# Altium PCB PCB1.PcbDoc
Units mm, origin at the board's own origin, x right, y up, seen from the top; angles counter-clockwise.
Board outline 52.2 x 46.48 mm, 2 copper layers (Top Layer, Bottom Layer); 58 components, 44 nets, 227 pads, 43 vias.
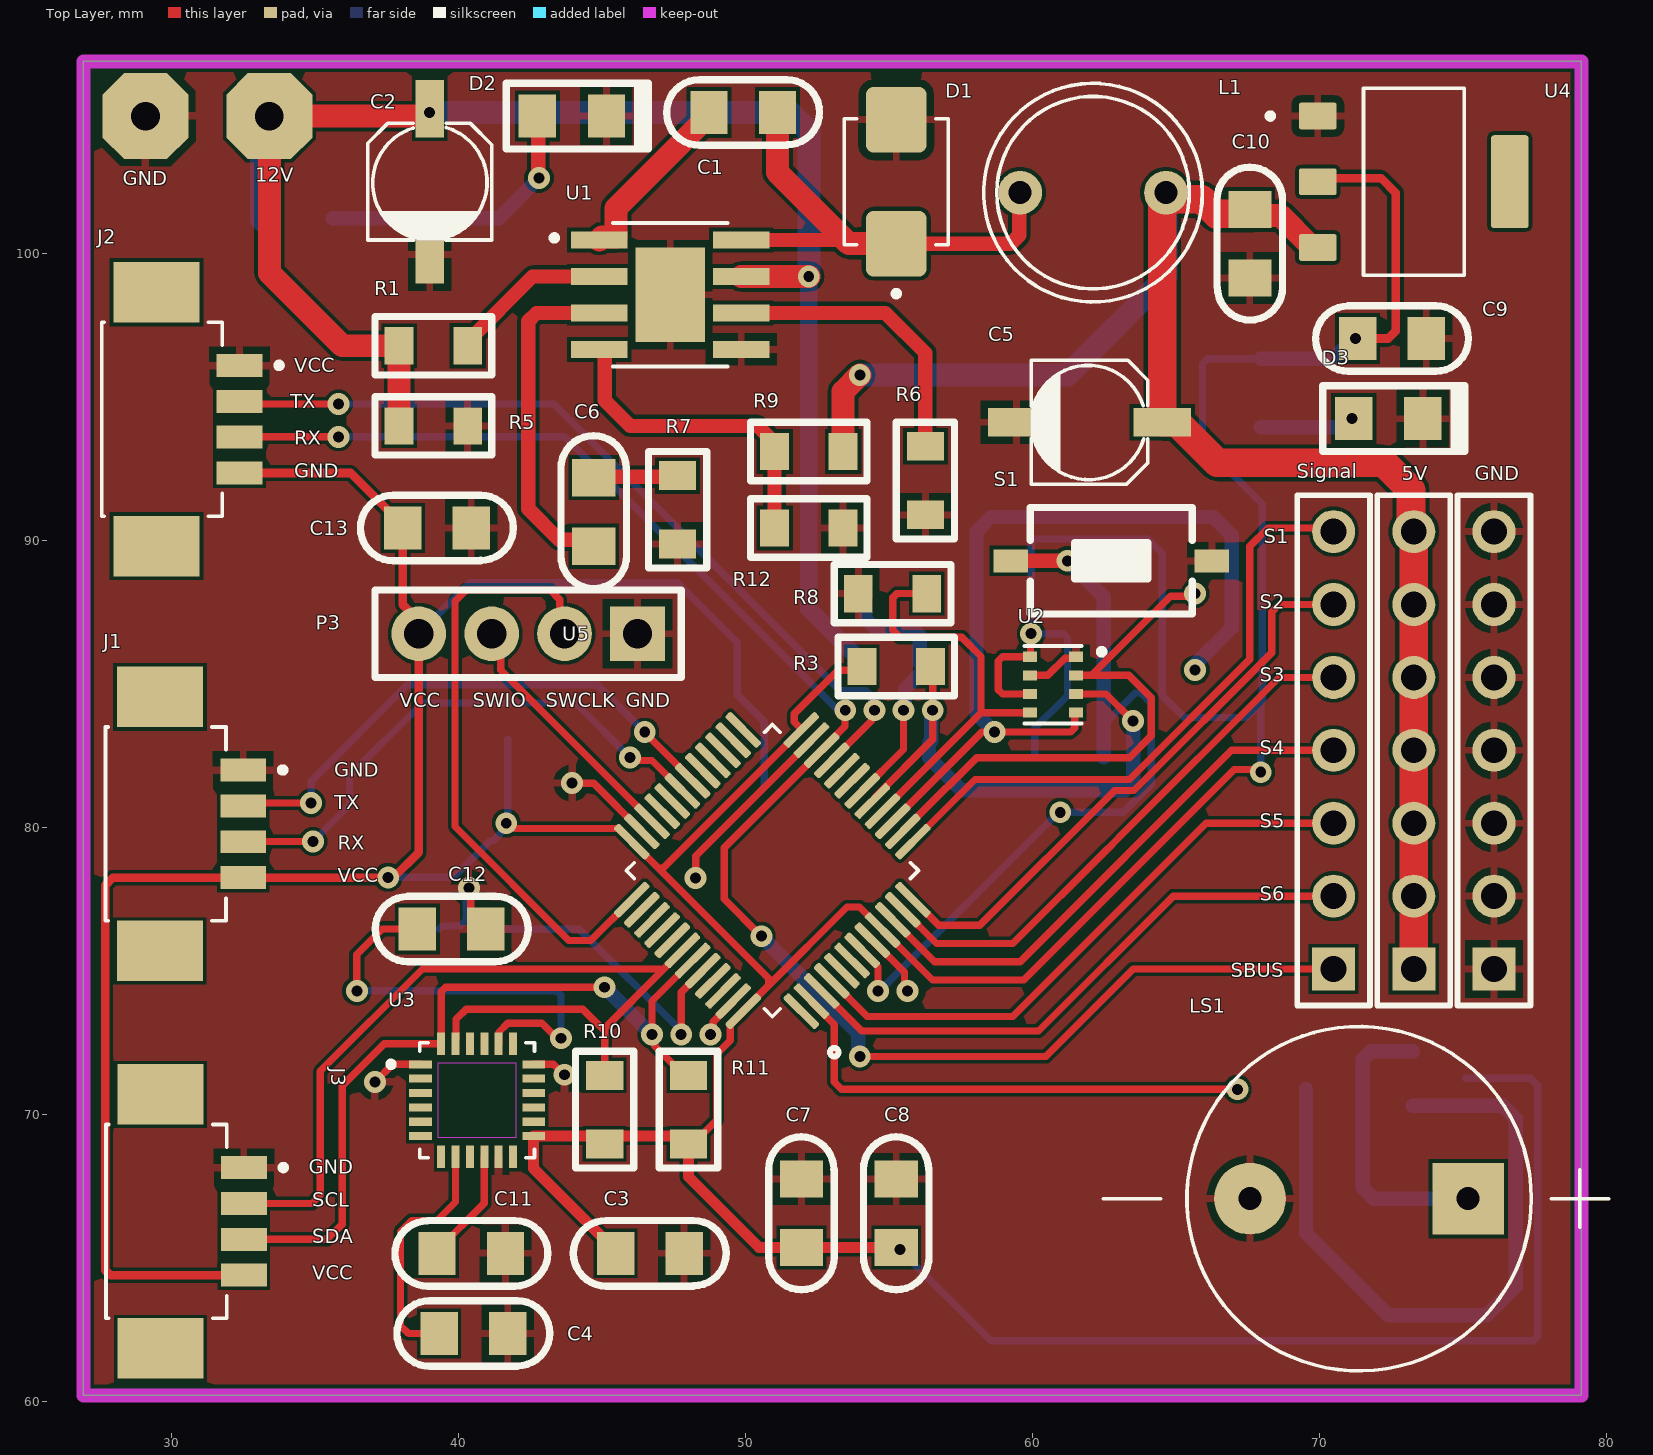
[diagram p0: Top Layer view]
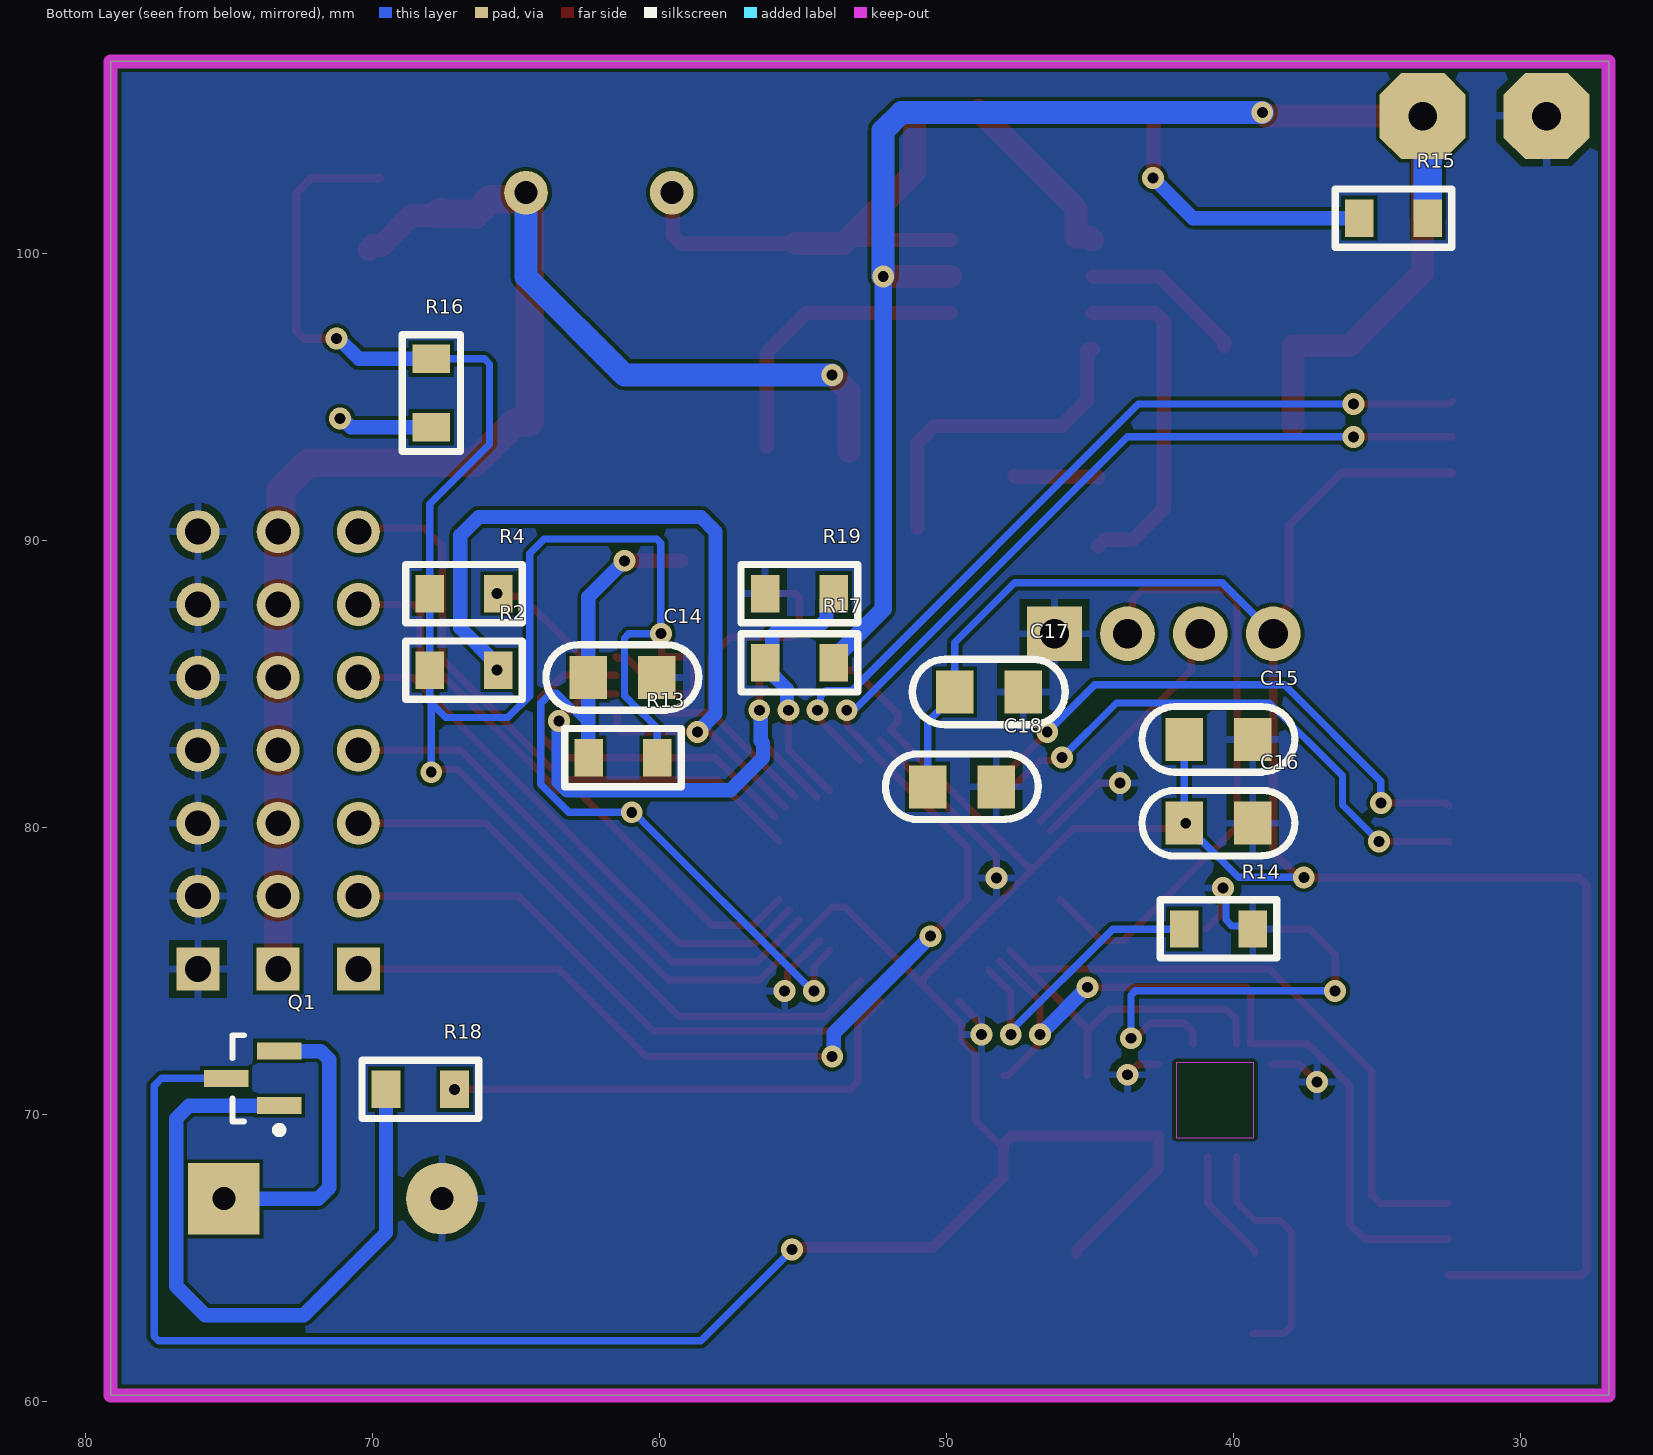
[diagram p1: Bottom Layer view, seen from below]
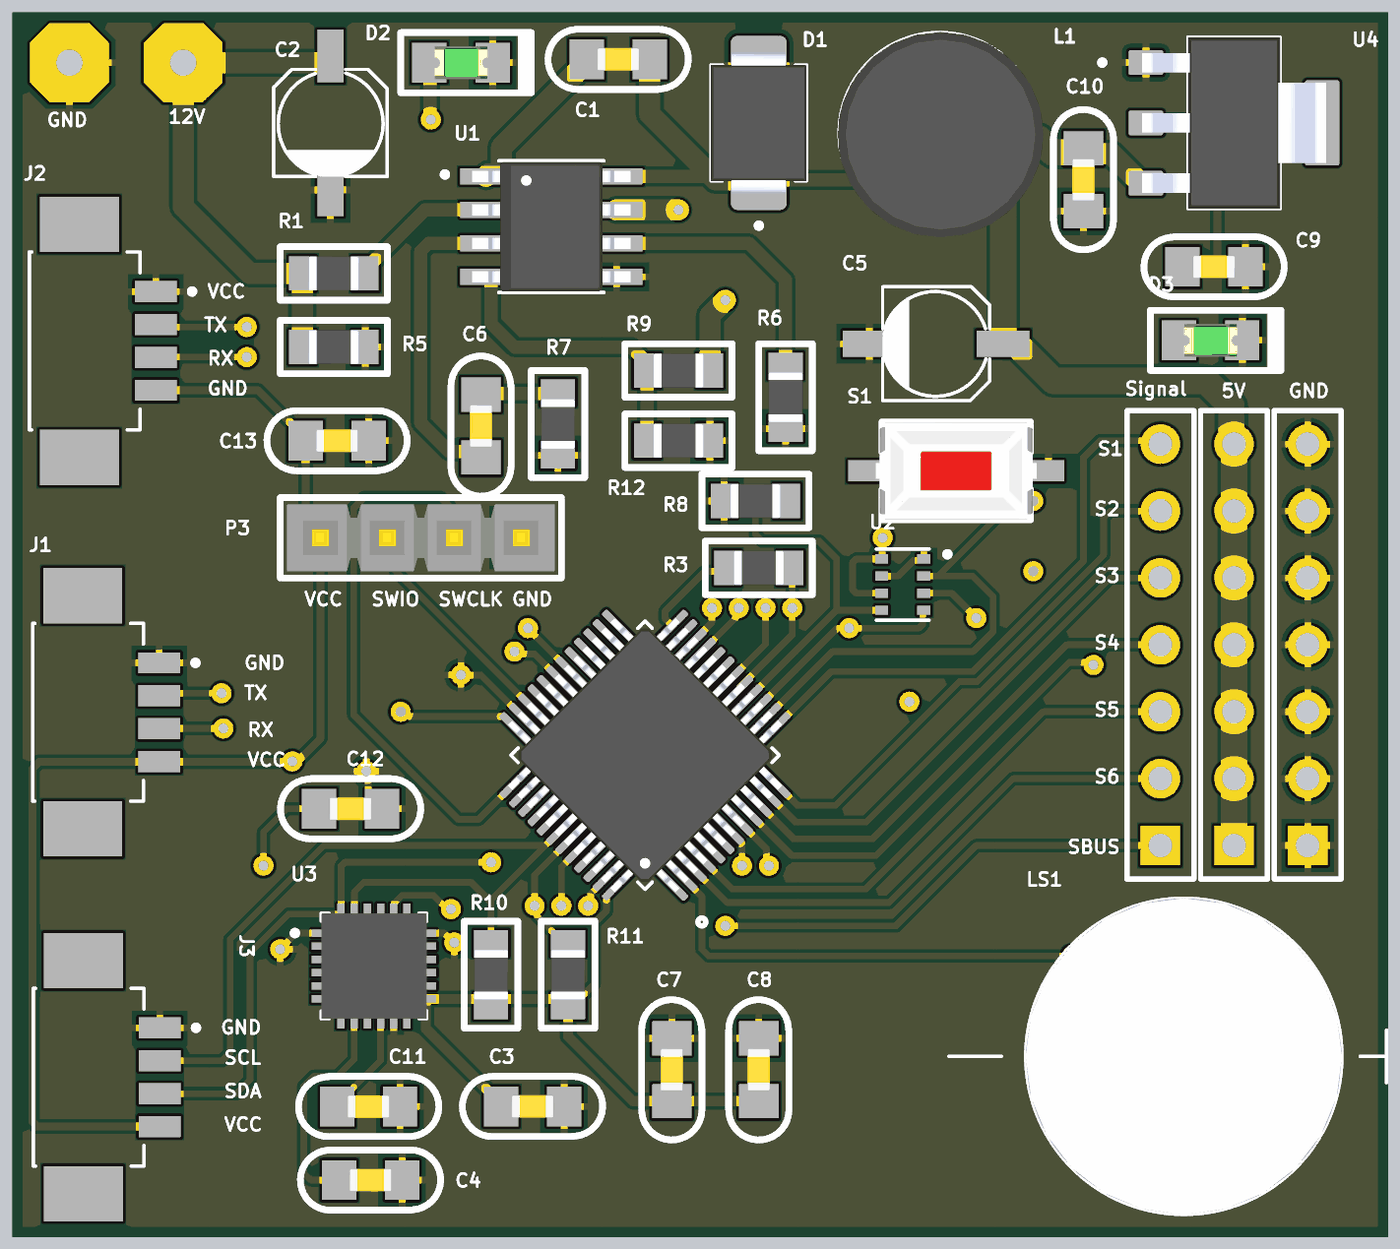
[diagram p2: 3D render of the assembled board from above, using the file's embedded part models]
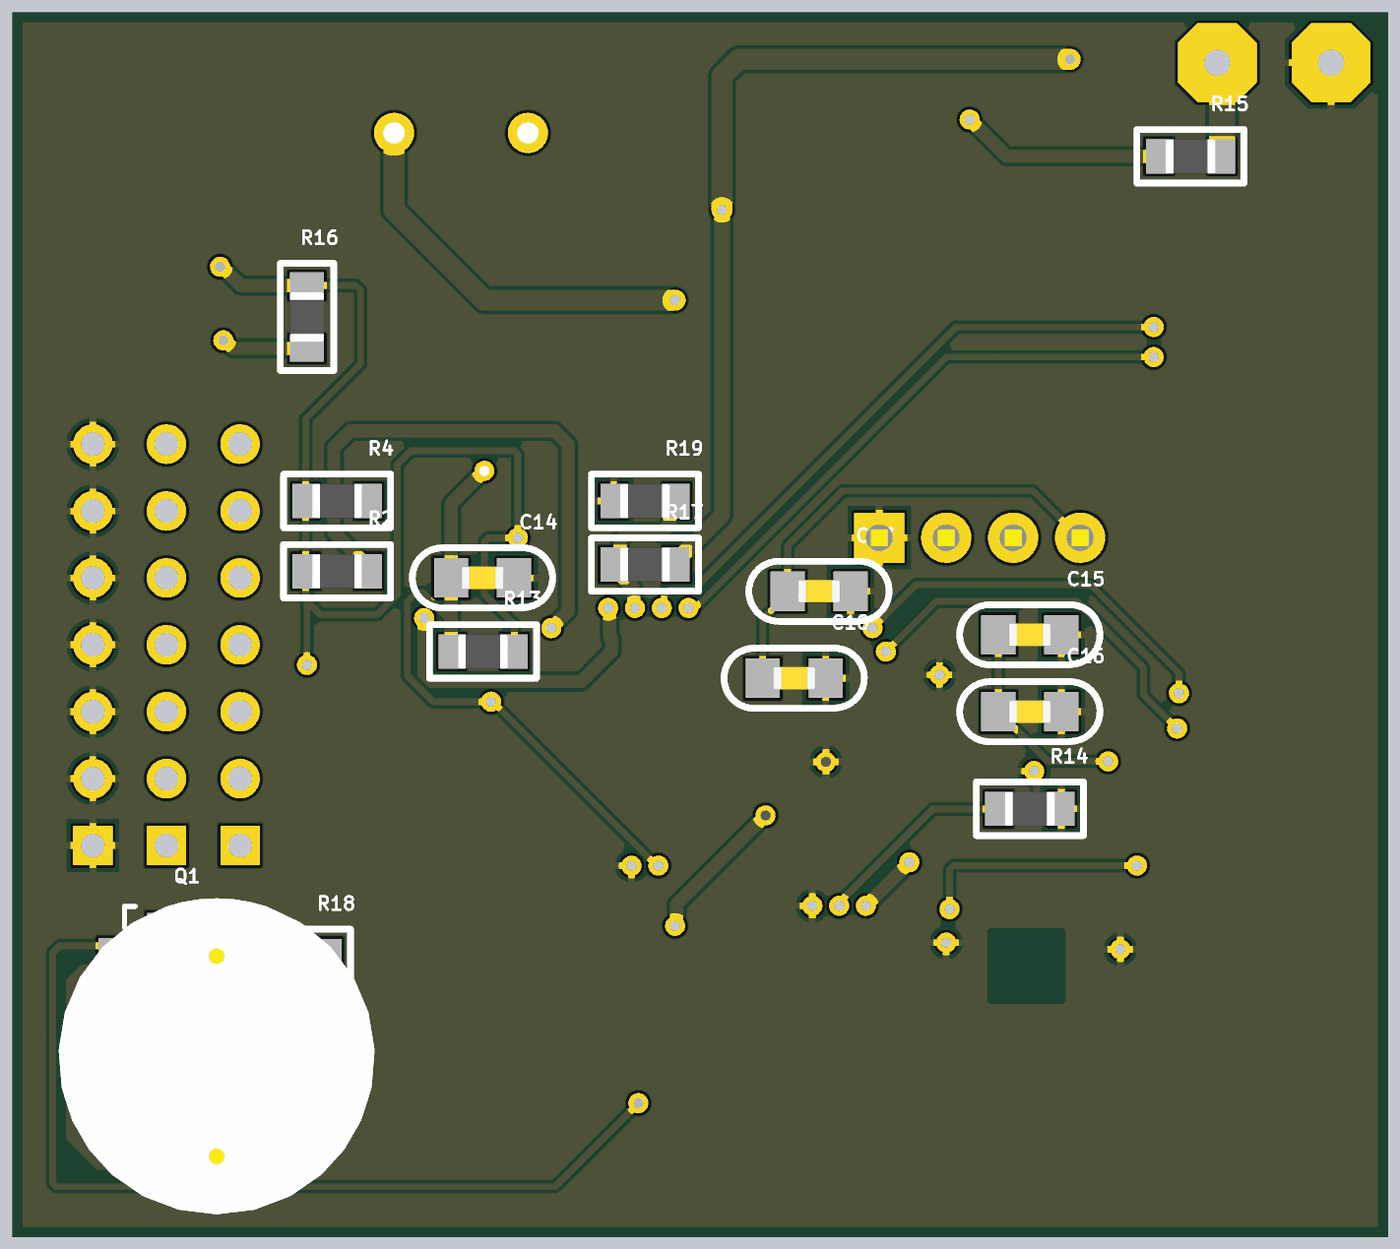
[diagram p3: 3D render of the assembled board from below, using the file's embedded part models]

## Layer stack, top to bottom
Top Solder: solder mask 0.0102, Solder Resist, Dk 3.5
Top Layer: signal copper 0.0356
Dielectric 1: dielectric 0.32, FR-4, Dk 4.8
Bottom Layer: signal copper 0.0356
Bottom Solder: solder mask 0.0102, Solder Resist, Dk 3.5

## Board outline
26.924,60.198 26.924,106.68 79.121,106.68 79.121,60.198

## Design rules (kind name [scope] priority, off if disabled: settings)
Clearance [All] p1: gap=0.127 ignorepadtopadclearanceinfootprint=FALSE
PolygonConnect [All] p1: connectstyle=Relief reliefconductorwidth=0.254 reliefentries=4 polygonreliefangle="90 Angle" airgapwidth=0.254
RoutingVias [All] p1: holewidth=0.381 width=0.762 viastyle="Through Hole" minholewidth=0.254 minwidth=0.762 maxholewidth=0.381 maxwidth=0.762
SolderMaskExpansion [All] p1: expansion=0.102 istentingtop=FALSE
Width [All] p1: maxlimit=1 minlimit=0.254 preferedwidth=0.8 minimp=50.000000 maximp=50.000000 favimp=50.000000
30 further rules are at their usual default settings.

## Components (designator, comment, footprint, x,y, rotation, side; value= is the part's Value field where it differs from the comment)
5V "Header 7_1" HDR1X7 73.279,75.057 r90 top (schematic designator P6)
12V "VBat" CP 33.401,104.775 r0 top (schematic designator P1)
C1 "Cap Non-pol" C-NP-0805 49.911,104.902 r0 top value=100nF
C2 "10uF" Cap_smd_4_3MM 38.989,102.489 r270 top
C3 "Cap Non-pol" C-NP-0805 46.66,65.151 r0 top value=104
C4 "Cap Non-pol" C-NP-0805 40.513,62.357 r0 top value=103
C5 "22uF" Cap_smd_4_3MM 61.976,94.107 r180 top
C6 "Cap Non-pol" C-NP-0805 44.704,90.983 r90 top value=150pF
C7 "Cap Non-pol" C-NP-0805 51.943,66.548 r90 top value=1uF
C8 "Cap Non-pol" C-NP-0805 55.245,66.548 r90 top value=0.1uF
C9 "Cap Non-pol" C-NP-0805 72.517,97.028 r180 top
C10 "Cap Non-pol" C-NP-0805 67.564,100.33 r270 top
C11 "Cap Non-pol" C-NP-0805 40.437,65.151 r180 top value=104
C12 "Cap Non-pol" C-NP-0805 39.751,76.454 r180 top value=2.2nF
C13 "Cap Non-pol" C-NP-0805 39.243,90.424 r0 top value=0.1uF
C14 "Cap Non-pol" C-NP-0805 61.283,85.217 r180 bottom value=1uF
C15 "Cap Non-pol" C-NP-0805 40.513,83.058 r180 bottom value=0.1uF
C16 "Cap Non-pol" C-NP-0805 40.513,80.137 r180 bottom value=0.1uF
C17 "Cap Non-pol" C-NP-0805 48.514,84.709 r180 bottom value=0.1uF
C18 "Cap Non-pol" C-NP-0805 49.454,81.407 r180 bottom value=0.1uF
D1 "SS24" DIOM5336X265N 55.245,102.489 r90 top
D2 "LED" "LED-0805 GREEN" 43.942,104.775 r0 top
D3 "LED" "LED-0805 GREEN" 72.39,94.234 r0 top
GND "Header 7_1" HDR1X7 76.073,75.057 r90 top (schematic designator P5)
GND "GND" CP 29.083,104.775 r0 top (schematic designator P2)
J1 "UART1" AMPHENOL_10114830-11104LF 29.791,80.117 r270 top
J2 "SBUS_Comm" AMPHENOL_10114830-11104LF 29.664,94.214 r270 top
J3 "UART3" AMPHENOL_10114830-11104LF 29.812,66.264 r270 top
L1 "" IMPE7-RS1 59.563,102.108 r0 top value=15uH
LS1 "CMI-1210-5-95T" XDCR_CMI-1210-5-95T 71.374,67.056 r180 top
P3 "Header 4" "Header 4" 46.228,86.741 r180 top
Q1 "C1815" "SOT23 [C1815]" 74.168,71.247 r0 bottom
R1 "RESISTOR" R-0805 39.116,96.774 r0 top value=100k
R2 "RESISTOR" R-0805 66.802,85.471 r180 bottom value=10K
R3 "RESISTOR" R-0805 55.245,85.598 r0 top value=10K
R4 "RESISTOR" R-0805 66.802,88.138 r180 bottom value=10K
R5 "RESISTOR" R-0805 39.116,93.98 r180 top value=24.9K
R6 "RESISTOR" R-0805 56.261,92.075 r90 top value=100K
R7 "RESISTOR" R-0805 47.625,91.059 r90 top value=100K
R8 "RESISTOR" R-0805 55.118,88.138 r180 top value=10K
R9 "RESISTOR" R-0805 52.197,93.091 r180 top value=210K
R10 "RESISTOR" R-0805 45.085,70.155 r90 top value=3.3K
R11 "RESISTOR" R-0805 48.006,70.155 r90 top value=3.3K
R12 "RESISTOR" R-0805 52.197,90.424 r0 top value=40.2K
R13 "RESISTOR" R-0805 61.265,82.423 r0 bottom value=10K
R14 "RESISTOR" R-0805 40.513,76.454 r180 bottom value=10K
R15 "RESISTOR" R-0805 34.417,101.219 r180 bottom value=1K
R16 "RESISTOR" R-0805 67.945,95.123 r90 bottom value=1K
R17 "RESISTOR" R-0805 55.118,85.725 r0 bottom value=3.33K
R18 "RESISTOR" R-0805 68.326,70.866 r0 bottom value=100R
R19 "RESISTOR" R-0805 55.118,88.138 r0 bottom value=1K
S1 "SW-SMD" SW-SMD 62.738,89.281 r180 top
Signal "Header 7_1" HDR1X7 70.485,75.057 r90 top (schematic designator P4)
U1 "MP1584EN-LF-Z" SOIC127P600X170-9N 47.371,98.552 r0 top
U2 "BMP280" XDCR_BMP280 60.706,84.963 r0 top
U3 "MPU-6050" QFN50P400X400X95-24N 40.64,70.485 r0 top
U4 "AMS1117-3.3" SOT229P700X180-4N 73.279,102.489 r0 top
U5 "STM32F103C8T6" QFP50P900X900X160-48N 50.927,78.486 r135 top

## Footprints (in the part's own frame and the unit in brackets; to place one, negate y for a bottom-side part, rotate by r counter-clockwise, add the part's x,y. Pads: shape width x height; smd on the part's side, far side on the other; paste and mask are expansions set on the pad)
AMPHENOL_10114830-11104LF [mm]
  rect 0.8x1.6 smd: 1(-1.875,2.7) 2(-0.625,2.7) 3(0.625,2.7) 4(1.875,2.7)
  rect 2.1x3 smd: SH1(-4.425,-0.2) SH2(4.425,-0.2)
  silkscreen extent -3.37,-2.1 3.37,4.18
C-NP-0805 [mm] "Chip Capacitor; Non-polarized; Body 2.0 x 1.3 mm (LxW typ) [2012]"
  rect 1.3x1.5 smd: 1(-1.194,0) 2(1.194,0)
  silkscreen extent -2.67,-1.14 2.66,1.14, body extent -0.8,-0.43 0.8,0.43, height 0.79
Cap_smd_4_3MM [mm] "10uF SMD"
  rect 2x1 smd: 1(-2.54,0) 2(2.54,0)
  silkscreen extent -2.03,-2.16 2.04,2.16, body extent -2.7,-2.16 2.73,2.09, height 4.51
CP [mm] "Connect Pad, 1-Pin"
  oct 3x3 hole 1: 1(0,0)
DIOM5336X265N [mm]
  rrect25% 2.29x2.12 smd: A(2.16,0) C(-2.16,0)
  silkscreen extent -4,-1.81 2.2,1.81, body extent -2.67,-1.81 2.67,1.81, height 2.65
HDR1X7 [mm] "Connector; Header; 7 Position"
  rect 1.5x1.5 hole 0.9: 1(0,0)
  round 1.5 hole 0.9: 2(2.54,0) 3(5.08,0) 4(7.62,0) 5(10.16,0) 6(12.7,0) 7(15.24,0)
  silkscreen extent -1.27,-1.27 16.51,1.27, body extent -1.27,-1.27 16.51,1.27, height 7
"Header 4" [mil] "Connector; Header; 4 Position; Solder Pad 35mil"
  rect 75x75 hole 40: 1(0,0)
  round 75 hole 40: 2(100,0) 3(200,0) 4(300,0)
  silkscreen extent -60,-60 360,60, body extent -50,-50 350,50, height 330
IMPE7-RS1 [mil] "Body round radial diam 7.5mm - hight 9.5mm"
  round 60 hole 31.49: 1(0,0) 2(200,0)
  silkscreen extent -50,-150 250,150, body extent -52,-156 255,151, height 209
"LED-0805 GREEN" [mm] "Chip LED; GREEN; Body 2.0 x 1.3 mm (LxW typ) [2012]"
  rect 1.3x1.5 smd: 1(-1.204,0) 2(1.204,0)
  silkscreen extent -2.29,-1.14 2.67,1.14, body extent -1.01,-0.63 1.01,0.62, height 1.1
QFN50P400X400X95-24N [mm]
  rect 0.79x0.28 smd: 1(-1.97,1.25) 2(-1.97,0.75) 3(-1.97,0.25) 4(-1.97,-0.25) 5(-1.97,-0.75) 6(-1.97,-1.25) 13(1.97,-1.25) 14(1.97,-0.75) 15(1.97,-0.25) 16(1.97,0.25) 17(1.97,0.75) 18(1.97,1.25)
  rect 0.28x0.79 smd: 7(-1.25,-1.97) 8(-0.75,-1.97) 9(-0.25,-1.97) 10(0.25,-1.97) 11(0.75,-1.97) 12(1.25,-1.97) 19(1.25,1.97) 20(0.75,1.97) 21(0.25,1.97) 22(-0.25,1.97) 23(-0.75,1.97) 24(-1.25,1.97)
  Keep-Out Layer region: 1.35,-1.3 -1.35,-1.3 -1.35,1.3 1.35,1.3
  silkscreen extent -3.1,-2 2,2, body extent -2,-2 2,2, height 0.93
QFP50P900X900X160-48N [mm]
  rrect50% 1.56x0.28 smd: 1(-4.18,2.75) 2(-4.18,2.25) 3(-4.18,1.75) 4(-4.18,1.25) 5(-4.18,0.75) 6(-4.18,0.25) 7(-4.18,-0.25) 8(-4.18,-0.75) 9(-4.18,-1.25) 10(-4.18,-1.75) 11(-4.18,-2.25) 12(-4.18,-2.75) 25(4.18,-2.75) 26(4.18,-2.25) 27(4.18,-1.75) 28(4.18,-1.25) 29(4.18,-0.75) 30(4.18,-0.25) 31(4.18,0.25) 32(4.18,0.75) 33(4.18,1.25) 34(4.18,1.75) 35(4.18,2.25) 36(4.18,2.75)
  rrect50% 0.28x1.56 smd: 13(-2.75,-4.18) 14(-2.25,-4.18) 15(-1.75,-4.18) 16(-1.25,-4.18) 17(-0.75,-4.18) 18(-0.25,-4.18) 19(0.25,-4.18) 20(0.75,-4.18) 21(1.25,-4.18) 22(1.75,-4.18) 23(2.25,-4.18) 24(2.75,-4.18) 37(2.75,4.18) 38(2.25,4.18) 39(1.75,4.18) 40(1.25,4.18) 41(0.75,4.18) 42(0.25,4.18) 43(-0.25,4.18) 44(-0.75,4.18) 45(-1.25,4.18) 46(-1.75,4.18) 47(-2.25,4.18) 48(-2.75,4.18)
  silkscreen extent -6.15,-3.6 3.6,3.6, body extent -4.5,-4.5 4.5,4.5, height 1.6
R-0805 [mm] "Chip Resistor; Body 2.0 x 1.3 mm (LxW typ) [2012]"
  rect 1x1.3 smd: 1(-1.194,0) 2(1.194,0)
  silkscreen extent -2.03,-1.02 2.03,1.02, body extent -0.95,-0.65 0.95,0.65, height 0.63
SOIC127P600X170-9N [mm]
  rect 1.97x0.6 smd: 1(-2.475,1.905) 2(-2.475,0.635) 3(-2.475,-0.635) 4(-2.475,-1.905) 5(2.475,-1.905) 6(2.475,-0.635) 7(2.475,0.635) 8(2.475,1.905)
  rect 2.41x3.3 smd paste-3: 9(0,0)
  silkscreen extent -4.14,-2.5 2,2.5, body extent -3,-2.45 3,2.45, height 1.7
"SOT23 [C1815]" [mm] "SOT23, 3-Leads, Body 3.0x2.6mm (max), Pitch 0.95mm, IPC Medium Density"
  rect 1.55x0.6 smd: 1(-0.925,0.95) 2(-0.925,-0.95) 3(0.925,0)
  silkscreen extent -1.05,-1.5 0.7,1.92, body extent -1.53,-1.5 1.53,1.5, height 1.1
SOT229P700X180-4N [mm]
  rrect15% 1.31x0.93 smd: 1(-3.345,2.29) 2(-3.345,0) 3(-3.345,-2.29)
  rrect15% 1.31x3.24 smd: 4(3.345,0)
  silkscreen extent -5.1,-3.25 1.75,3.25, body extent -3.5,-3.25 3.5,3.25, height 1.8
SW-SMD [mm] "Switch SMD type"
  rect 1.2x0.8 smd: 1(-3.5,0) 2(3.5,0)
  silkscreen extent -2.82,-1.85 2.82,1.85, body extent -3.05,-1.85 3.05,1.85, height 2.5
XDCR_BMP280 [mm]
  rect 0.5x0.35 smd: 1(0.8,0.975) 2(0.8,0.325) 3(0.8,-0.325) 4(0.8,-0.975) 5(-0.8,-0.975) 6(-0.8,-0.325) 7(-0.8,0.325) 8(-0.8,0.975)
  silkscreen extent -1,-1.35 1.8,1.35
XDCR_CMI-1210-5-95T [mm]
  round 2.5 hole 0.8: N(3.8,0)
  rect 2.5x2.5 / inner round 2.5 / far side rect 2.5x2.5 hole 0.8: P(-3.8,0)
  silkscreen extent -8.69,-6 8.92,6, body extent -6,-6 6,6, height 7

## Part data
5V GND Signal: "Header, 7-Pin", LatestRevisionDate=17-Jul-2002, LatestRevisionNote="Re-released for DXP Platform.", Publisher="Altium Limited"
12V GND: library part "Connect Pad", "Connect Pad, 1-Pin", LatestRevisionDate=17-Jul-2002, LatestRevisionNote="Re-released for DXP Platform.", Publisher="Altium Limited"
C1 C3 C4 C6 C7 C8 C9 C10 C11 C12 C13 C14 C15 C16 C17 C18: "Non-polarized Capacitor", LatestRevisionDate=17-Jul-2002, LatestRevisionNote="Re-released for DXP Platform.", PackageReference=RAD-0.3, Published=8-Jun-2000, Publisher="Altium Limited"
C2: library part Cap_Pol, "Polarized Capacitor", Capacitor Type=Tant, Manufacturer=FARNELL, Volt=50V, AEMS Code=2100110, ComponentLink1Description="Digikey Part Link", ComponentLink2Description="Open Datasheet", ComponentLink2URL=H:\LIBRARY\LIBRARY.Datasheet\, Published=13-April-2009, Publisher="Hoang Nguyen", Vendor=Digikey
C5: library part Cap_Pol, "Polarized Capacitor", Capacitor Type=Tant, Manufacturer=FARNELL, Volt=6.3V, AEMS Code=2100110, ComponentLink1Description="Digikey Part Link", ComponentLink2Description="Open Datasheet", ComponentLink2URL=H:\LIBRARY\LIBRARY.Datasheet\, Published=13-April-2009, Publisher="Hoang Nguyen", Vendor=Digikey
D1: "Diode Schottky 40V 2A Surface Mount DO-214AA (SMB)", Package="DO-214AA ON Semiconductor", Availability="In Stock", Check_prices=https://www.snapeda.com/parts/SS24/Onsemi/view-part/?ref=eda, MF="ON Semiconductor", MP=SS24, Price=None, SnapEDA_Link=https://www.snapeda.com/parts/SS24/Onsemi/view-part/?ref=snap
D2 D3: "Typical LED", LatestRevisionDate=08-Jul-2005, LatestRevisionNote="Mech Layer 1 removed.", PackageReference=LED-1, Published=8-Jun-2000, Publisher="Altium Limited"
J1 J2 J3: library part 10114830-11104LF, Package=None, Availability=Unavailable, MF="{'manufacturer': u'Amphenol ICC (FCI)'}", MP=10114830-11104LF, Price=None
L1: library part Inductor_1, "Cuon Cam L", Code_IEC=1005, Code_JEITA=0402, ComponentLink1Description="Digikey Part Link", ComponentLink2Description="Open Datasheet", ComponentLink2URL=H:\LIBRARY\LIBRARY.Datasheet\, LatestRevisionDate=17-Jul-2002, LatestRevisionNote="Re-released for DXP Platform.", PackageReference=0402-A, Published=8-Jun-2000, Publisher="Altium Limited", Vendor=Digikey
LS1: "12 mm, 5 Vdc, 98 dB, Through Hole, Magnetic Audio Indicator Buzzer", Package=None, Check_prices=https://www.snapeda.com/parts/CMI-1210-5-95T/Same+Sky/view-part/?ref=eda, MF="Same Sky", MP=CMI-1210-5-95T, SnapEDA_Link=https://www.snapeda.com/parts/CMI-1210-5-95T/Same+Sky/view-part/?ref=snap
P3: "Header, 4-Pin", LatestRevisionDate=17-Jul-2002, LatestRevisionNote="Re-released for DXP Platform.", Publisher="Altium Limited"
Q1: "Q2SC1815", PSpiceTemplate="Q^@REFDES %c %b %e @MODEL", COMPONENT=2SC1815, ComponentLink1Description="Digikey Part Link", ComponentLink2Description="Open Datasheet", ComponentLink2URL=H:\LIBRARY\LIBRARY.Datasheet\, Price=500VND, Published=13-April-2009, Publisher="Hoang Nguyen", Vendor=Digikey
R1 R2 R3 R4 R5 R6 R7 R8 R9 R10 R11 R12 R13 R14 R15 R16 R17 R18 R19: "Resistor", LatestRevisionDate=17-Jul-2002, LatestRevisionNote="Re-released for DXP Platform.", PackageReference=AXIAL-0.3, Published=8-Jun-2000, Publisher="Altium Limited"
S1: "Switch", LatestRevisionDate=17-Jul-2002, LatestRevisionNote="Re-released for DXP Platform.", PackageReference=SPST-2, Published=24-Mar-1999, Publisher="Altium Limited"
U1: "Buck Switching Regulator IC Positive Adjustable 0.8V 1 Output 3A 8-SOIC (0.154, 3.90mm Width) Exposed Pad", Package="SOIC-8 Monolithic Power Systems", Check_prices=https://www.snapeda.com/parts/MP1584ENLFZ/Monolithic+Power+Systems/view-part/?ref=eda, MF="Monolithic Power Systems", MP=MP1584ENLFZ, SnapEDA_Link=https://www.snapeda.com/parts/MP1584ENLFZ/Monolithic+Power+Systems/view-part/?ref=snap
U2: "BMP280 Absolute Barometric Pressure Sensor for Battery Powered Devices 2 x 2.5mm", Package=None, Availability=Unavailable, MP=BMP280, Price=None
U3: "MPU-6050 series Accelerometer, Gyroscope, 3 Axis Sensor Evaluation Board", Package="QFN-24 InvenSense", Check_prices=https://www.snapeda.com/parts/MPU-6050/TDK+InvenSense/view-part/?ref=eda, MF="TDK InvenSense", MP=MPU-6050, SnapEDA_Link=https://www.snapeda.com/parts/MPU-6050/TDK+InvenSense/view-part/?ref=snap
U4: "Sot223/Pkg 1-Amp 3.3-Volt Low Drop Out Voltage Regulatator", Package="SOT-223 Seeed Technology", Availability="Not in stock", Check_prices=https://www.snapeda.com/parts/AMS1117-3.3/Advanced+Monolithic+Systems/view-part/?ref=eda, MF="Advanced Monolithic Systems", MP=AMS1117-3.3, Price=None, SnapEDA_Link=https://www.snapeda.com/parts/AMS1117-3.3/Advanced+Monolithic+Systems/view-part/?ref=snap
U5: "ARM® Cortex®-M3 STM32F1 Microcontroller IC 32-Bit 72MHz 64KB (64K x 8) FLASH 48-LQFP (7x7)", Package="LQFP-48 STMicroelectronics", Check_prices=https://www.snapeda.com/parts/STM32F103C8T6/STMicroelectronics/view-part/?ref=eda, MF=STMicroelectronics, MP=STM32F103C8T6, SnapEDA_Link=https://www.snapeda.com/parts/STM32F103C8T6/STMicroelectronics/view-part/?ref=snap

## Via types
v1: diameter 0.762, hole 0.381, Top Layer to Bottom Layer, 43 vias

## Nets (pads, with @x,y where several pads share a name; then routed paths per layer and width w, separated by ;. In a path a pad name is that pad's centre, name@x,y a point inside that pad or via, vN(x,y) a via of type N, cw(c..) or ccw(c..) an arc to the next point about the centre after c; other vN are vias at no path point)
+5: 5V.1 5V.2 5V.3 5V.4 5V.5 5V.6 5V.7 C5.1 C10.1 L1.2 R9.1 U4.3 | length 58.8
  Top Layer w0.8: R9.1 53.391,95.174 v1(53.975,95.758) ; C10.1 67.714,101.374 67.768,101.32 68.623,101.32 69.679,100.264 69.978,100.264 U4.3@70.108,100.134
  Top Layer w1: C10.1@67.714,101.374 66.449,101.374 66.421,101.346 65.886,101.881 64.616,101.881 64.516,101.981 C5.1 65.016,94.107 66.43,92.693 72.234,92.693 73.183,91.743 73.183,90.393 5V.7 5V.6 5V.5 5V.4 5V.3 5V.2 5V.1
  Bottom Layer w0.8: v1(53.975,95.758) 61.214,95.758 64.643,99.187 L1.2
+12: 12V.1 C2.1 R1.1 R5.2 R15.2 R17.1 U1.7 | length 58.2
  Top Layer w0.8: R5.2 R1.1 35.941,96.774 33.401,99.314 12V.1 38.889,104.775 38.989,104.875 v1(38.989,104.902) ; U1.7 v1(52.197,99.187)
  Bottom Layer w0.6: v1(52.197,99.187) 52.197,87.602 53.824,85.975 R17.1@53.824,85.721
  Bottom Layer w0.8: v1(38.989,104.902) 51.562,104.902 52.197,104.267 v1(52.197,99.187)
  Bottom Layer w1: R15.2 33.223,104.597 12V.1
\: J1.3 U5.31 | length 19.2
  Top Layer w0.254: J1.3 32.501,79.502 v1(34.925,79.502) ; v1(45.974,82.423) 46.071,82.326 46.734,82.326 U5.31
  Bottom Layer w0.254: v1(34.925,79.502) 36.195,80.772 36.195,81.788 38.735,84.328 44.069,84.328 v1(45.974,82.423)
A0: R17.2 R19.1 U5.18 | length 9.8
  Top Layer w0.254: U5.18 55.499,82.704 v1(55.499,84.074)
  Bottom Layer w0.5: R19.1 54.174,87.888 54.174,87.255 54.467,86.962 55.769,86.962 56.062,86.669 56.062,85.721 R17.2@56.312,85.471 ; v1(55.499,84.074) 55.549,84.124 55.549,84.812 56.312,85.575 R17.2
AD0: U3.9
BZ: R18.1 U5.2 | length 17.3
  Top Layer w0.254: U5.2 52.292,73.921 53.086,73.127 53.086,71.12 53.34,70.866 v1(67.132,70.866)
CS: R4.2 U2.2 U5.14 | length 18.4
  Top Layer w0.254: U5.14@55.982,80.359 58.046,82.423 63.373,82.423 64.135,83.185 64.135,84.504 63.351,85.288 62.047,85.288 ; U2.2 62.047,85.288 ; v1(65.659,88.138) 65.565,88.044 64.803,88.044 62.047,85.288
GND: C2.2 C3.2 C4.2 C5.2 C7.2 C8.2 C9.1 C10.2 C11.1 C12.1 C13.2 C14.2 C15.2 C16.2 C17.2 C18.2 D1.A D2.2 D3.2 GND.1 GND.2 GND.3 GND.4 GND.5 GND.6 GND.7 J1.1 J2.1 J3.1 LS1.N P3.1 R5.1 R6.1 R7.1 R8.2 R12.2 R14.2 R19.2 S1.1 U1.5 U1.9 U2.1 U2.7 U3.1 U3.11 U3.18 U4.1 U5.8 U5.23 U5.35 U5.47 | length 22.2
  Top Layer w0.254: v1(37.084,71.12) 37.699,71.735 U3.1 ; v1(40.352,77.885) 40.422,77.815 40.422,76.977 C12.1 ; U3.18 43.305,71.735 43.666,71.374 v1(43.688,71.374) ; v1(43.942,81.534) 43.949,81.527 44.704,81.527 U5.35 ; v1(48.255,78.232) 48.255,78.996 U5.23 ; v1(48.768,72.771) 48.865,72.868 48.865,73.224 49.562,73.921 U5.47 ; U5.8 55.533,74.94 55.533,74.388 v1(55.631,74.29) ; U2.7 60.523,85.288 61.125,85.89 61.458,85.89 U2.1
  Bottom Layer w0.254: R14.2 39.424,76.559 40.051,76.559 40.255,76.763 40.255,77.787 v1(40.352,77.885)
INT: U3.12
MISO: R8.1 U2.5 U5.16 | length 13.6
  Top Layer w0.254: U5.16@55.275,81.066 58.197,83.988 ; R8.1 55.267,88.138 55.118,87.989 55.118,86.868 55.372,86.614 57.531,86.614 58.197,85.948 58.197,83.988 ; U2.5 58.197,83.988
MOSI: R3.2 U2.3 U5.17 | length 19.3
  Top Layer w0.254: U5.17@54.503,81.046 56.515,83.058 56.515,85.522 R3.2 ; U2.3 62.555,84.638 v1(63.5,83.693)
  Bottom Layer w0.5: v1(56.515,84.074) 56.465,84.024 56.465,83 56.388,82.923 56.388,82.423 57.531,81.28 63.207,81.28 63.5,81.573 v1(63.5,83.693)
NetC1_1: C1.1 U1.1 | length 6.4
  Top Layer w0.8: U1.1 44.996,100.557 45.481,100.557 45.481,101.566 C1.1@48.885,104.97
NetC1_2: C1.2 D1.C L1.1 U1.8 | length 16.8
  Top Layer w0.5: U1.8 53.595,100.457 ; D1.C 59.239,100.329 59.532,100.622 59.532,101.885 L1.1@59.436,101.981
  Top Layer w0.8: C1.2 51.105,102.819 53.595,100.329 D1.C
NetC4_1: C4.1 U3.8 | length 8.7
  Top Layer w0.254: C4.1 38.28,62.357 38.227,62.379 37.973,62.612 37.973,65.913 38.354,66.294 39.243,66.294 39.89,66.941 U3.8
NetC6_1: C6.1 U1.3 | length 12
  Top Layer w0.5: C6.1 44.474,90.019 43.497,90.019 42.418,91.098 42.418,97.624 42.711,97.917 U1.3
NetC6_2: C6.2 R7.2 | length 3
  Top Layer w0.5: C6.2 44.742,92.215 47.587,92.215 R7.2
NetC11_2: C11.2 U3.10 | length 4
  Top Layer w0.254: C11.2 39.243,65.251 40.89,66.898 U3.10
NetC12_2: C12.2 U3.20 | length 15.3
  Top Layer w0.254: v1(36.449,74.295) 36.449,75.565 37.338,76.454 C12.2 ; U3.20 41.403,72.468 41.403,72.862 41.705,73.164 42.904,73.164 43.424,72.644 v1(43.561,72.644)
  Bottom Layer w0.254: v1(36.449,74.295) 43.412,74.295 43.561,74.146 v1(43.561,72.644)
NetD2_1: D2.1 R15.1 | length 10
  Top Layer w0.5: D2.1 42.769,104.744 42.769,102.646 v1(42.799,102.616)
  Bottom Layer w0.5: R15.1 41.402,101.219 v1(42.799,102.616)
NetD3_1: D3.1 R16.1 | length 3.3
  Bottom Layer w0.5: R16.1 70.744,93.929 71.049,94.234 v1(71.12,94.234)
NetLS1_P: LS1.P Q1.2 | length 10.2
  Bottom Layer w0.5: Q1.2 71.794,72.197 71.501,71.904 71.501,67.437 71.882,67.056 LS1.P
NetQ1_1: Q1.1 R18.2 | length 23.5
  Bottom Layer w0.5: R18.2 69.52,65.862 72.39,62.992 75.819,62.992 76.835,64.008 76.835,69.85 76.388,70.297 Q1.1
NetR1_2: R1.2 U1.2 | length 5.7
  Top Layer w0.5: R1.2 40.31,96.924 42.573,99.187 U1.2
NetR6_2: R6.2 U1.6 | length 10.2
  Top Layer w0.5: U1.6 54.864,97.917 56.261,96.52 R6.2
NetR9_2: R9.2 R12.1 U1.4 | length 11.4
  Top Layer w0.5: U1.4 45.035,96.647 45.085,96.597 45.085,94.869 45.974,93.98 50.419,93.98 51.003,93.396 R9.2 R12.1
NetR14_1: R14.1 U5.44 | length 10.2
  Top Layer w0.254: v1(47.752,72.771) 47.752,74.25 U5.44
  Bottom Layer w0.254: R14.1@41.707,76.446 44.204,76.446 47.752,72.898 v1(47.752,72.771)
NRST: C14.1 R13.2 S1.2 U5.7 | length 28.4
  Top Layer w0.254: U5.7 54.059,75.689 54.61,75.138 v1(54.61,74.295)
  Top Layer w0.5: S1.2 v1(61.214,89.281)
  Bottom Layer w0.254: v1(54.61,74.295) 54.673,74.295 60.896,80.518 63.158,80.518 64.135,81.495 64.135,84.322 63.786,84.672 63.575,84.672 62.611,83.707
  Bottom Layer w0.5: v1(61.214,89.281) 62.477,88.018 R13.2@62.477,82.441
  other v1: 60.96,80.518
S1: Signal.7 U5.13 | length 21.5
  Top Layer w0.254: U5.13 57.991,81.661 63.373,81.661 67.564,85.852 67.564,89.789 68.199,90.424 70.358,90.424 Signal.7
S2: Signal.6 U5.12 | length 20.5
  Top Layer w0.254: U5.12 56.721,76.581 58.157,76.581 62.856,81.28 63.531,81.28 68.326,86.075 68.326,87.503 68.58,87.757 Signal.6
S3: Signal.5 U5.11 | length 19.3
  Top Layer w0.254: U5.11 56.649,75.946 59.309,75.946 62.611,79.248 62.62,79.248 62.992,79.62 62.992,79.629 68.58,85.217 Signal.5
S4: Signal.4 U5.10 | length 19
  Top Layer w0.254: U5.10 56.577,75.311 59.563,75.311 66.929,82.677 Signal.4
S5: Signal.3 U5.4 | length 20.8
  Top Layer w0.254: U5.4 54.239,73.406 59.309,73.406 66.04,80.137 Signal.3
S6: Signal.2 U5.3 | length 20.4
  Top Layer w0.254: U5.3 54.04,72.898 60.198,72.898 64.897,77.597 Signal.2
SBUS: J2.3 Signal.1 U5.22 | length 58.6
  Top Layer w0.254: J2.3 32.374,93.599 v1(35.814,93.599) ; v1(50.546,76.2) 49.249,77.497 49.249,79.283 U5.22 52.645,82.698 53.46,83.512 53.46,84.067 v1(53.467,84.074) ; v1(53.975,72.009) 60.452,72.009 63.5,75.057 Signal.1
  Bottom Layer w0.254: v1(35.814,93.599) 43.688,93.599 53.116,84.171 53.37,84.171 v1(53.467,84.074)
  Bottom Layer w0.5: v1(50.546,76.2) 53.925,72.821 53.925,72.059 v1(53.975,72.009)
SCK: R2.2 U2.4 U5.15 | length 29.4
  Top Layer w0.254: U5.15@55.628,80.712 58.228,83.312 v1(58.674,83.312) 61.319,83.312 61.468,83.461 61.468,83.95 U2.4
  Bottom Layer w0.5: v1(58.674,83.312) 58.039,83.947 58.039,90.297 58.547,90.805 66.294,90.805 66.929,90.17 66.929,86.942 65.659,85.672 v1(65.659,85.471)
SCL: J3.2 R10.2 U3.23 U5.42 | length 32.4
  Top Layer w0.254: J3.2 34.885,66.889 35.179,67.183 35.179,71.501 38.735,75.057 47.02,75.057 ; U3.23 39.903,72.723 39.903,73.304 40.259,73.66 44.323,73.66 45.085,72.898 ; R10.2 45.085,72.898 ; U5.42 47.342,75.255 47.267,75.18 47.196,75.109 47.082,74.995 45.085,72.998 45.085,72.898
SDA: J3.3 R11.2 U3.24 U5.43 | length 27.6
  Top Layer w0.254: J3.3 35.413,65.639 35.941,66.167 35.941,70.993 37.403,72.455 U3.24 39.39,74.273 39.539,74.422 v1(45.085,74.422) ; R11.2 47.856,71.349 46.833,72.371 46.833,72.674 v1(46.736,72.771) 46.736,73.941 U5.43
  Bottom Layer w0.5: v1(45.085,74.422) v1(46.736,72.771)
SWCLK: P3.2 U5.37 | length 21.5
  Top Layer w0.254: P3.2 43.519,86.91 43.519,87.926 43.18,88.265 40.259,88.265 39.868,87.874 39.868,80.02 43.837,76.051 44.603,76.051 U5.37
SWIO: P3.3 U5.34 | length 8.9
  Top Layer w0.254: P3.3 41.464,86.425 41.464,85.474 U5.34
UART1_TX: J1.2 U5.30 | length 19.3
  Top Layer w0.254: J1.2 32.589,80.84 v1(34.857,80.84) ; v1(46.482,83.312) 46.482,83.298 48.148,81.632 U5.30
  Bottom Layer w0.254: v1(34.857,80.84) 34.857,81.602 38.218,84.963 44.831,84.963 v1(46.482,83.312)
UART3_TX: J2.2 U5.21 | length 29.2
  Top Layer w0.254: J2.2 32.461,94.742 v1(35.814,94.742) ; U5.21 54.386,83.713 54.386,83.977 v1(54.483,84.074)
  Bottom Layer w0.254: v1(35.814,94.742) 43.307,94.742 53.296,84.753 54.193,84.753 54.386,84.56 54.386,84.171 v1(54.483,84.074)
VCC: C3.1 C7.1 C8.1 C9.2 C13.1 C15.1 C16.1 C17.1 C18.1 J1.4 J2.4 J3.4 P3.4 Q1.3 R2.1 R3.1 R4.1 R10.1 R11.1 R13.1 R16.2 U2.6 U2.8 U3.13 U4.2 U5.9 U5.24 U5.36 U5.48 | length 237.3
  Top Layer w0.254: v1(41.656,80.137) 41.793,80.137 41.981,79.95 45.574,79.95 U5.36 46.95,78.573 ; R11.1 48.156,68.961 48.992,69.797 48.992,72.097 49.463,72.568 49.463,73.115 49.916,73.567 49.916,73.604 50.8,74.488 ; R3.1@54,85.471 53.213,85.471 51.689,83.947 51.689,83.663 51.943,83.409 51.943,83.391 U5.24 47.125,78.573 46.95,78.573 ; U2.6 58.95,84.638 58.801,84.787 58.801,85.789 58.95,85.938 U2.8 59.925,85.957 59.925,86.722 v1(59.944,86.741) ; v1(67.945,81.915) 67.848,82.012 67.026,82.012 59.69,74.676 56.505,74.676 U5.9 53.965,77.216 53.528,77.216 50.8,74.488 ; 46.95,78.573 50.8,74.724 50.8,74.488
  Top Layer w0.3: J2.4 36.234,92.339 38.049,90.524 C13.1 38.049,87.747 38.608,87.188 P3.4 38.608,79.121 v1@37.729,78.242 ; J3.4 27.862,64.389 27.686,64.565 27.686,77.978 27.95,78.242 J1.4 v1@37.543,78.242 ; U4.2@69.746,102.616 72.136,102.616 72.644,102.108 72.644,97.282 72.39,97.028 C9.2 v1(71.247,97.028)
  Top Layer w0.381: C3.1 45.466,65.251 42.61,68.107 U3.13 45.085,69.235 47.732,69.235 R11.1 48.006,67.818 50.47,65.354 C7.1 C8.1
  Bottom Layer w0.254: v1(37.543,78.251) 39.821,78.251 41.084,79.514 41.184,79.514 C16.1@41.707,80.037 ; P3.4 40.386,88.519 47.625,88.519 49.708,86.436 C17.1 49.708,84.609 50.648,83.669 C18.1 ; C16.1 C15.1 ; v1(55.372,65.278) 58.547,62.103 77.448,62.103 77.597,62.252 77.597,70.993 77.343,71.247 Q1.3 ; R13.1 60.071,83.454 60.525,83.908 60.539,83.908 61.214,84.582 61.214,86.592 61.065,86.741 v1(59.944,86.741) 59.944,89.894 60.093,90.043 64.008,90.043 64.516,89.535 64.516,84.582 65.278,83.82 67.437,83.82 67.945,84.328 ; v1(67.945,81.915) 67.945,84.328 ; R16.2 66.091,96.317 65.913,96.139 65.913,93.345 67.996,91.262 R4.1 R2.1 67.996,84.379 67.945,84.328
  Bottom Layer w0.5: R16.2 70.465,96.317 71.176,97.028 v1(71.247,97.028)
XCL: U3.7
XDA: U3.6
pads on no net: J1.SH1 J1.SH2 J2.SH1 J2.SH2 J3.SH1 J3.SH2 U3.2 U3.3 U3.4 U3.5 U3.14 U3.15 U3.16 U3.17 U3.19 U3.21 U3.22 U4.4 U5.1 U5.5 U5.6 U5.19 U5.20 U5.25 U5.26 U5.27 U5.28 U5.29 U5.32 U5.33 U5.38 U5.39 U5.40 U5.41 U5.45 U5.46

## Polygon pours and split planes (outlines as drawn)
GND on Top Layer "GND_L01_P000" (solid, pour order 0): 26.924,106.68 79.121,106.68 79.121,60.198 26.924,60.198
GND on Bottom Layer "GND_L02_P001" (solid, pour order 1): 26.924,106.68 26.924,60.325 27.051,60.198 78.994,60.198 78.994,106.68

## Keep-outs
Keep-Out Layer:
  the board outline again, w0.5

## Silkscreen, mask and mechanical layers (free items; w line width, h text height)
Top Overlay:
  text "VCC" at 34.263,95.858 h0.5
  text "TX" at 34.136,94.588 h0.5
  text "RX" at 34.263,93.318 h0.5
  text "GND" at 34.263,92.175 h0.5
  text "S1" at 68.045,89.889 h0.5
  text "S2" at 67.918,87.603 h0.5
  text "S3" at 67.918,85.063 h0.5
  text "VCC" at 37.946,84.174 h0.5
  text "SWIO" at 40.486,84.174 h0.5
  text "SWCLK" at 43.026,84.174 h0.5
  text "GND" at 45.82,84.174 h0.5
  text "S4" at 67.918,82.523 h0.5
  text "GND" at 35.66,81.761 h0.5
  text "TX" at 35.66,80.618 h0.5
  text "S5" at 67.918,79.983 h0.5
  text "RX" at 35.787,79.221 h0.5
  text "VCC" at 35.787,78.078 h0.5
  text "S6" at 67.918,77.443 h0.5
  text "SBUS" at 66.902,74.776 h0.5
  text "GND" at 34.771,67.918 h0.5
  text "SCL" at 34.898,66.775 h0.5
  text "SDA" at 34.898,65.505 h0.5
  text "VCC" at 34.898,64.235 h0.5